# Altium PCB SparkFun_HX711_Load_Cell_v11.PcbDoc
Units mil, origin at the board's own origin, x right, y up, seen from the top; angles counter-clockwise.
Board outline 1200 x 900 mil, 2 copper layers (Top, Bottom), stack 61.811 mil thick; 30 components, 43 nets, 65 pads, 5 vias.
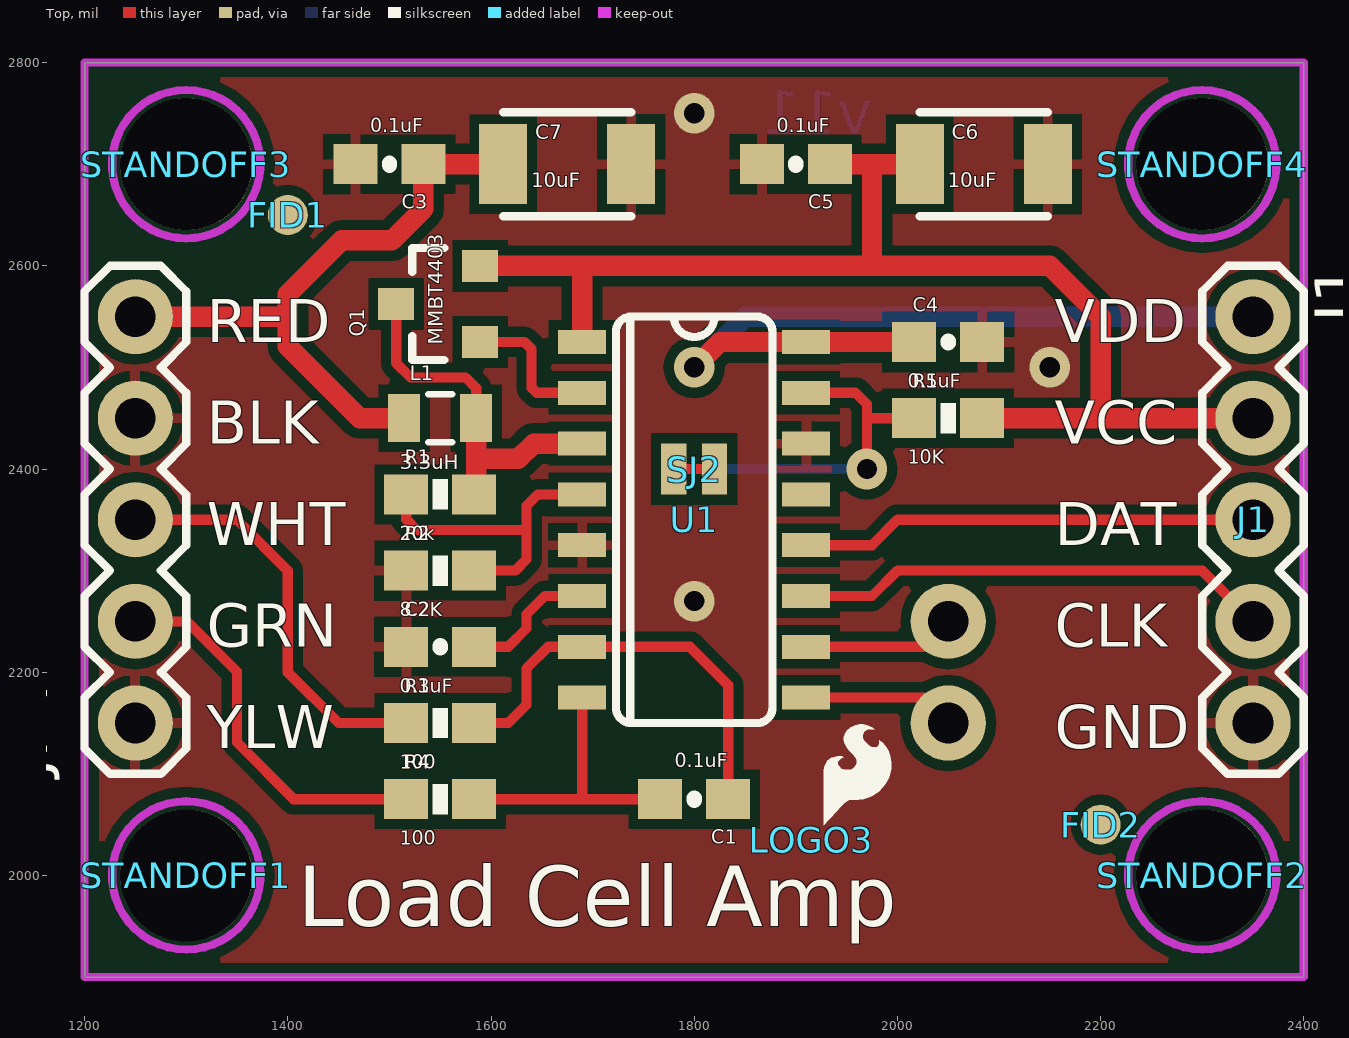
[diagram p0: Top view]
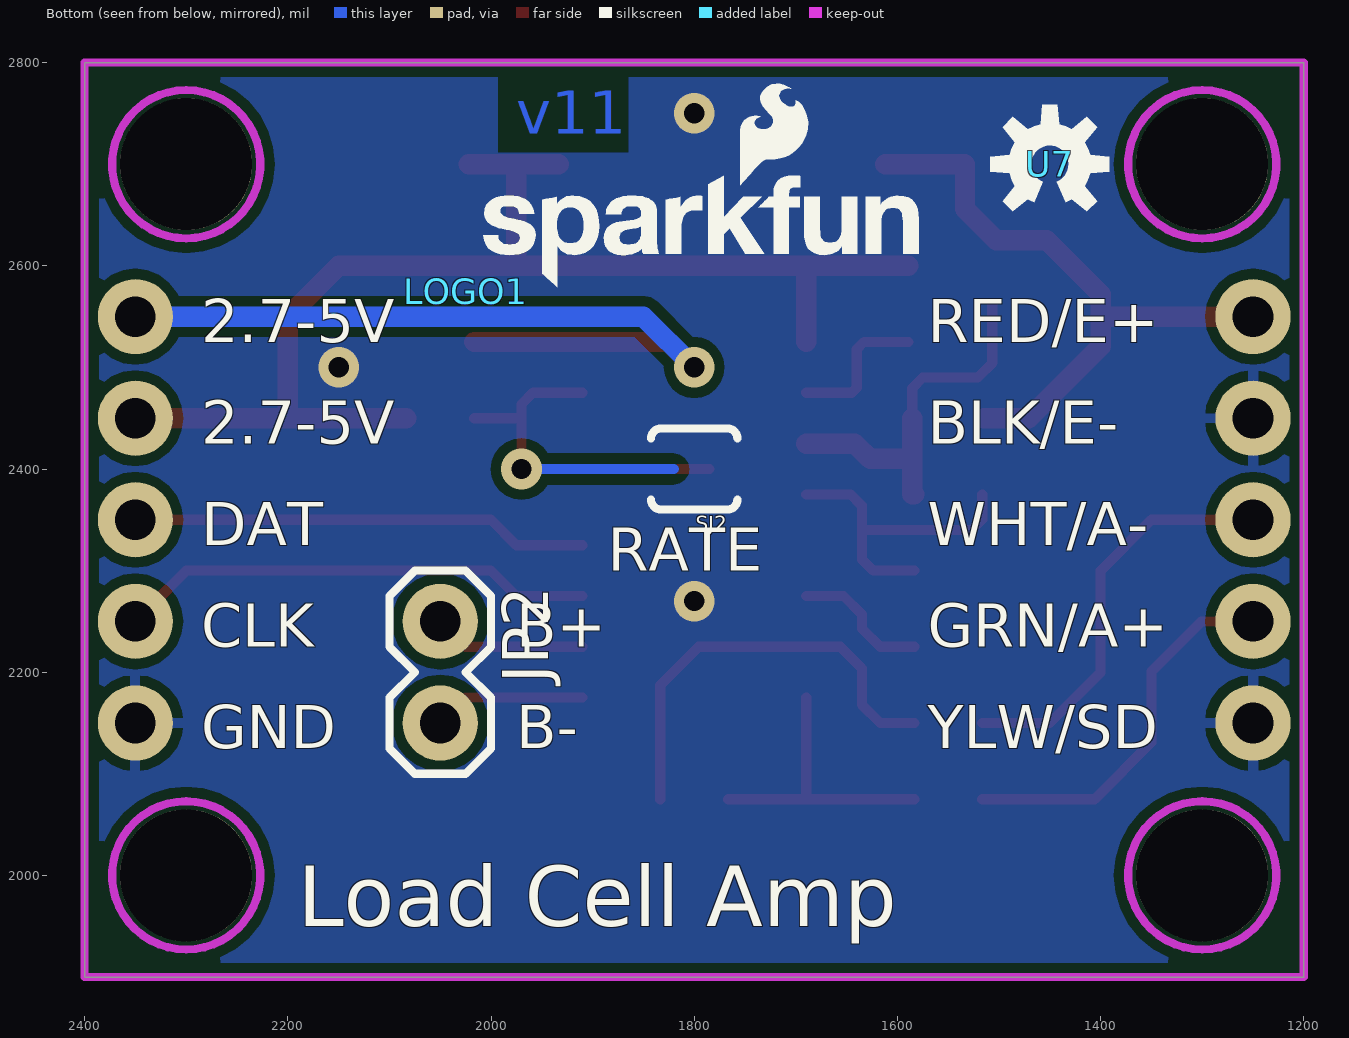
[diagram p1: Bottom view, seen from below]

## Layer stack, top to bottom
Top Solder: solder mask 0.4, Solder Resist, Dk 3.5
Top: signal copper 1.378
Dielectric 1: core 59.0551, FR-4, Dk 4.8
Bottom: signal copper 1.378
Bottom Solder: solder mask 0.4, Solder Resist, Dk 3.5

## Board outline
1200,2800 2400,2800 2400,1900 1200,1900

## Design rules (kind name [scope] priority, off if disabled: settings)
Clearance [All] p1: gap=10 except(0: SMDPad-SMDPad SMDPad-THPad SMDPad-Via; 8: Track-THPad THPad-THPad)
Clearance "Clearance (Same Net)" [All] p2: gap=0 except(8: SMDPad-SMDPad SMDPad-THPad SMDPad-Via)
HoleSize HoleSize_1 [All] p1: absolutevalues=TRUE maxlimit=100000 minlimit=20 maxpercent=80.000 minpercent=20.000
HoleSize [All] p2: absolutevalues=TRUE maxlimit=100 minlimit=1 maxpercent=80.000 minpercent=20.000
HoleToHoleClearance mdViaViaSameLayer [All] p1: gap=8 allowstackedmicrovias=TRUE
HoleToHoleClearance [All] p2: gap=10 allowstackedmicrovias=TRUE
PasteMaskExpansion mlMinCreamFrame [All] p1: expansion=0
PasteMaskExpansion [All] p2: expansion=0
PolygonConnect ThermalVias [IsVia] p1: connectstyle=Direct reliefconductorwidth=10 reliefentries=4 polygonreliefangle="90 Angle" airgapwidth=10
PolygonConnect [All] p2: connectstyle=Relief reliefconductorwidth=10 reliefentries=4 polygonreliefangle="90 Angle" airgapwidth=10
RoutingVias [All] p1: holewidth=28 width=50 viastyle="Through Hole" minholewidth=28 minwidth=50 maxholewidth=28 maxwidth=50
SilkToSilkClearance [All] p1 off: silktosilkclearance=10
SilkToSolderMaskClearance [IsPad] p1 off: minsilkscreentomaskgap=10 clearancetoexposedcopper=TRUE
SolderMaskExpansion mlMinStopFrame [All] p1: expansion=4
SolderMaskExpansion [All] p2: expansion=4
Width Width_1 [All] p1: maxlimit=100000 minlimit=10 preferedwidth=10
Width [All] p2: maxlimit=10 minlimit=10 preferedwidth=10
25 further rules are at their usual default settings.

## Components (designator, comment, footprint, x,y, rotation, side; value= is the part's Value field where it differs from the comment)
C1 "0.1uF" 0603-CAP 1800,2075 r180 top
C2 "0.1uF" 0603-CAP 1550,2225 r0 top
C3 "0.1uF" 0603-CAP 1500,2700 r180 top
C4 "0.1uF" 0603-CAP 2050,2525 r0 top
C5 "0.1uF" 0603-CAP 1900,2700 r180 top
C6 "10uF" 1210 2085,2700 r0 top
C7 "10uF" 1210 1675,2700 r0 top
FID1 "" FIDUCIAL-1X2 1400,2650 r0 top
FID2 "" FIDUCIAL-1X2 2200,2050 r0 top
FRAME1 "" CREATIVE_COMMONS 1000,1150 r0 top
J1 "" 1X05 2350,2550 r270 top
JP2 "" 1X02 2050,2250 r270 bottom
JP4 "" 1X05 1250,2150 r90 top
L1 "3.3uH" 0805 1550,2450 r0 top
LOGO1 "" SFE_LOGO_NAME_FLAME_.1 2025,2575 r180 bottom
LOGO3 "" SFE_LOGO_FLAME_.1 1915,2035 r0 top
Q1 "MMBT4403" SOT23-3 1550,2562.5 r90 top
R1 "20k" 0603-RES 1550,2375 r0 top
R2 "8.2K" 0603-RES 1550,2300 r0 top
R3 "100" 0603-RES 1550,2150 r0 top
R4 "100" 0603-RES 1550,2075 r0 top
R5 "10K" 0603-RES 2050,2450 r0 top
SJ2 "" PAD-JUMPER-2-NC_BY_TRACE_YES_SILK 1800,2400 r0 bottom
STANDOFF1 "" STAND-OFF 1300,2000 r0 top
STANDOFF2 "" STAND-OFF 2300,2000 r0 top
STANDOFF3 "" STAND-OFF 1300,2700 r0 top
STANDOFF4 "" STAND-OFF 2300,2700 r0 top
U1 "" SO16 1800,2350 r270 top
U7 "" OSHW-LOGO-S 1450,2700 r180 bottom
U$1 "" REVISION 1475,1000 r0 top

## Footprints (in the part's own frame and the unit in brackets; to place one, negate y for a bottom-side part, rotate by r counter-clockwise, add the part's x,y. Pads: shape width x height; smd on the part's side, far side on the other; paste and mask are expansions set on the pad)
1X02 [mil] "1X02"
  round 74 hole 40: 1(0,0) 2(100,0)
  silkscreen extent -50,-50 150,50
1X05 [mil] "1X05"
  round 74 hole 40: 1(0,0) 2(100,0) 3(200,0) 4(300,0) 5(400,0)
  silkscreen extent -50,-50 450,50
0603-CAP [mm] "0603-CAP"
  rect 1.1x1 smd: 1(-0.85,0) 2(0.85,0)
  silkscreen extent 0,-0.03 0,0.03
0603-RES [mm] "0603-RES"
  rect 1.1x1 smd: 1(-0.85,0) 2(0.85,0)
  silkscreen extent -0.19,-0.38 0.19,0.38
0805 [mil] "0805"
  rect 31.5x47.24 smd: 1(-35.43,0) 2(35.43,0)
  silkscreen extent -12,-24 12,24
1210 [mm] "1210"
  rect 1.2x2 smd: 1(-1.6,0) 2(1.6,0)
  silkscreen extent -1.6,-1.3 1.6,1.3
CREATIVE_COMMONS [mil] "CREATIVE_COMMONS"
FIDUCIAL-1X2 [mm] "FIDUCIAL-1X2"
  rrect100% 1x1 smd: 1(0,0)
OSHW-LOGO-S [mil] "OSHW-LOGO-S"
  silkscreen extent -59,-47 59,59
PAD-JUMPER-2-NC_BY_TRACE_YES_SILK [mil] "PAD-JUMPER-2-NC_BY_TRACE_YES_SILK"
  rect 25x50 smd far side: 1(-20,0) 2(20,0)
  Bottom lines w10: -15,0 15,0
  silkscreen extent -42,-40 42,40
REVISION [mil] "REVISION"
SFE_LOGO_FLAME_.1 [mil] "SFE_LOGO_FLAME_.1"
  silkscreen extent 13,14 79,114
SFE_LOGO_NAME_FLAME_.1 [mil] "SFE_LOGO_NAME_FLAME_.1"
  silkscreen extent 17,4 446,204
SO16 [mil] "SO16"
  rect 23.62x47.24 smd: 1(-175,-110.24) 2(-125,-110.24) 3(-75,-110.24) 4(-25,-110.24) 5(25,-110.24) 6(75,-110.24) 7(125,-110.24) 8(175,-110.24) 9(175,110.24) 10(125,110.24) 11(75,110.24) 12(25,110.24) 13(-25,110.24) 14(-75,110.24) 15(-125,110.24) 16(-175,110.24)
  silkscreen extent -200,-77 200,77
SOT23-3 [mil] "SOT23-3"
  rect 31.5x35.43 smd: 1(-37.4,-39.37) 2(37.4,-39.37) 3(0,43.31)
  silkscreen extent -55,-4 55,28
STAND-OFF [mil] "STAND-OFF"
  round 130 hole 130: 1(0,0)
  Top keep-out lines w8: 0,-73 ccw(c0,0) 0,73 ccw(c0,0) 0,-73
  Bottom keep-out lines w8: 0,-73 ccw(c0,0) 0,73 ccw(c0,0) 0,-73

## Part data
C1 C2 C3 C4 C5: library part 0603-CAP
C6 C7: library part 1210
FID1 FID2: library part FIDUCIAL-1X2
FRAME1: library part CREATIVE_COMMONS
J1 JP4: library part 1X05
JP2: library part 1X02
L1: library part 0805
LOGO1: library part SFE_LOGO_NAME_FLAME_.1
LOGO3: library part SFE_LOGO_FLAME_.1
Q1: library part SOT23-3
R1 R2 R3 R4 R5: library part 0603-RES
SJ2: library part PAD-JUMPER-2-NC_BY_TRACE_YES_SILK
STANDOFF1 STANDOFF2 STANDOFF3 STANDOFF4: library part STAND-OFF
U1: library part SO16
U7: library part OSHW-LOGO-S
U$1: library part REVISION

## Via types
v1: diameter 40/40 (per signal layer), hole 20, Top to Bottom, 5 vias

## Nets (pads, with @x,y where several pads share a name; then routed paths per layer and width w, separated by ;. In a path a pad name is that pad's centre, name@x,y a point inside that pad or via, vN(x,y) a via of type N, cw(c..) or ccw(c..) an arc to the next point about the centre after c; other vN are vias at no path point)
A+: JP4.2 R4.1 | length 379.8
  Top w10: JP4.2 1300.5,2250 1350,2200.5 1350,2130.9 1405.9,2075 R4.1
A-: JP4.3 R3.1 | length 408
  Top w10: JP4.3 1350,2350 1400,2300 1400,2200 1450,2150 R3.1
AVDD: C3.1 C7.1 JP4.5 L1.1 | length 636
  Top w20: JP4.5 1400,2550 ; L1.1 1470.71,2450 1400,2520.71 1400,2550 ; C7.1 C3.1 1533.46,2655.83 1502.63,2625 1453.15,2625 1400,2571.85 1400,2550
B+: JP2.1 U1.10 | length 150.1
  Top w10: U1.10 2025,2225 JP2.1
B-: JP2.2 U1.9 | length 150.1
  Top w10: U1.9 2025,2175 JP2.2
DAT: J1.3 U1.12 | length 450.1
  Top w10: U1.12 1975,2325 2000,2350 J1.3
GND: C2.1 C3.2 C4.2 C5.2 C6.2 C7.2 J1.5 JP4.1 JP4.4 R2.1 SJ2.1 U1.5 U1.14
  other v1: 1800,2270 2150,2500 1800,2750
N$1: R5.1 SJ2.2 U1.15 | length 324.8
  Top w10: U1.15 1958.82,2475 1970,2463.82 1970,2450 ; v1(1970,2400) 1970,2450 ; R5.1 1970,2450
  Bottom w10: 1820,2400 v1(1970,2400)
N$2: C1.1 R3.2 U1.7 | length 429.8
  Top w10: R3.2 1616.97,2150 1635,2168.03 1635,2203.79 1656.21,2225 U1.7 1795.58,2225 1833.46,2187.12 C1.1
N$3: C1.2 R4.2 U1.8 | length 283.1
  Top w10: R4.2 1650,2075 1689.76,2075 ; U1.8 1689.76,2075 ; C1.2 1689.76,2075
N$4: Q1.1 U1.2 | length 143.4
  Top w10: Q1.1 1632.86,2525.1 1640,2517.96 1640,2480 1645,2475 U1.2
N$5: L1.2 Q1.3 R1.2 U1.3 | length 364.3
  Top w10: Q1.3 1506.69,2504.22 1520.91,2490 1575,2490 1585.43,2479.57 L1.2
  Top w20: R1.2 1585.43,2375 1585.43,2410 ; L1.2 1585.43,2410 ; U1.3 1641.97,2425 1626.97,2410 1585.43,2410
N$6: R1.1 R2.2 U1.4 | length 315.5
  Top w10: R1.1 1516.54,2350.58 1527.12,2340 1635,2340 ; R2.2 1623.82,2300 1635,2311.18 1635,2340 ; U1.4 1646.18,2375 1635,2363.82 1635,2340
N$7: C2.2 U1.6 | length 135.2
  Top w10: C2.2 1616.97,2225 1635,2243.03 1635,2256.97 1653.03,2275 U1.6
N$15: 
N$17: 
N$22: 
N$24: 
N$29: 
N$31: 
N$36: 
N$40: 
N$45: 
N$48: 
N$49: 
N$55: 
N$56: 
N$61: 
N$64: 
N$69: 
N$70: 
N$75: 
N$78: 
N$83: 
N$84: 
N$89: 
N$92: 
N$97: 
N$99: 
N$100: 
SCK: J1.4 U1.11 | length 470.8
  Top w10: U1.11 1975,2275 2000,2300 2300,2300 J1.4
VCC: C5.1 C6.1 J1.2 Q1.2 R5.2 U1.1 | length 1261.9
  Top w20: Q1.2 1589.37,2600 1689.76,2600 ; U1.1 1689.76,2600 ; 1910.24,2599.76 1910,2600 ; C5.1 1975,2700 ; C6.1 1975,2700 ; R5.2 2200,2450 ; J1.2 2200,2450 ; 1689.76,2600 1910,2600 ; 1910,2600 1975,2600 ; 1975,2600 2150,2600 2200,2550 2200,2450 ; 1975,2600 1975,2700
VDD: C4.1 J1.1 U1.16 | length 903.9
  Top w20: v1(1800,2500) 1825,2525 C4.1 U1.16
  Bottom w20: v1(1800,2500) 1850,2550 J1.1
pads on no net: FID1.1 FID2.1 STANDOFF1.1 STANDOFF2.1 STANDOFF3.1 STANDOFF4.1 U1.13

## Polygon pours and split planes (outlines as drawn)
GND on Top "Top-GND" (solid, remove dead copper, pour order 0): 1195,2805 1195,1895 2405,1895 2405,2805
GND on Bottom "Bottom-GND" (solid, remove dead copper, pour order 2): 1195,2805 1195,1895 2405,1895 2405,2805

## Keep-outs
Keep-Out Layer:
  the board outline again, w8

## Other copper
Bottom:
  text "v11" at 1975,2730 h42.5

## Silkscreen, mask and mechanical layers (free items; w line width, h text height)
Top Overlay:
  text "RED" at 1320,2525 h42.5
  text "VDD" at 2155,2525 h42.5
  text "BLK" at 1320,2425 h42.5
  text "VCC" at 2155,2425 h42.5
  text "WHT" at 1320,2325 h42.5
  text "DAT" at 2155,2325 h42.5
  text "GRN" at 1320,2225 h42.5
  text "CLK" at 2155,2225 h42.5
  text "YLW" at 1320,2125 h42.5
  text "GND" at 2155,2125 h42.5
  text "Load Cell Amp" at 1410,1950 h59.5
Bottom Overlay:
  text "RED/E+" at 1570,2525 h42.5
  text "2.7-5V" at 2285,2525 h42.5
  text "BLK/E-" at 1570,2425 h42.5
  text "2.7-5V" at 2285,2425 h42.5
  text "WHT/A-" at 1570,2325 h42.5
  text "DAT" at 2285,2325 h42.5
  text "RATE" at 1885,2300 h42.5
  text "GRN/A+" at 1570,2225 h42.5
  text "B+" at 1975,2225 h42.5
  text "CLK" at 2285,2225 h42.5
  text "YLW/SD" at 1570,2125 h42.5
  text "B-" at 1975,2125 h42.5
  text "GND" at 2285,2125 h42.5
  text "Load Cell Amp" at 2190,1950 h59.5
Dimension:
  the board outline again, w8
Measures:
  text "Units are in inches" at 1250,1505 h108.5
tDocu:
  text "N. Seidle" at 2200,1150 h59.5
  text "Alex Wende" at 2200,1000 h59.5

## Dimensions
2400,2800 to 1200,2800 on Measures
1200,1900 to 1200,2800 on Measures
2300,2700 to 2300,2000 on Measures
2300,2000 to 1300,2000 on Measures
1250,2500 to 2350,2500 on Measures
1250,2150 to 1250,1900 on Measures

## Text inside footprints (layer, text, board x,y; h text height)
FRAME1: tDocu "Released under the Creative Commons Attribution Share-Alike 4.0 License" at 200,1350 h59.5; tDocu "https://creativecommons.org/licenses/by-sa/4.0/" at 1000,1250 h59.5; tDocu "Designed by:" at 1450,1150 h59.5
U$1: tDocu "Revision By:" at 1475,1000 h59.5